# Altium PCB esp_rot.PcbDoc
Units mil, origin at the board's own origin, x right, y up, seen from the top; angles counter-clockwise.
Board outline 2559.06 x 3149.61 mil, 2 copper layers (Top Layer, Bottom Layer), stack 65.792 mil thick; 17 components, 14 nets, 86 pads, 4 vias.
Unrouted connection lines stored in the file: 14.
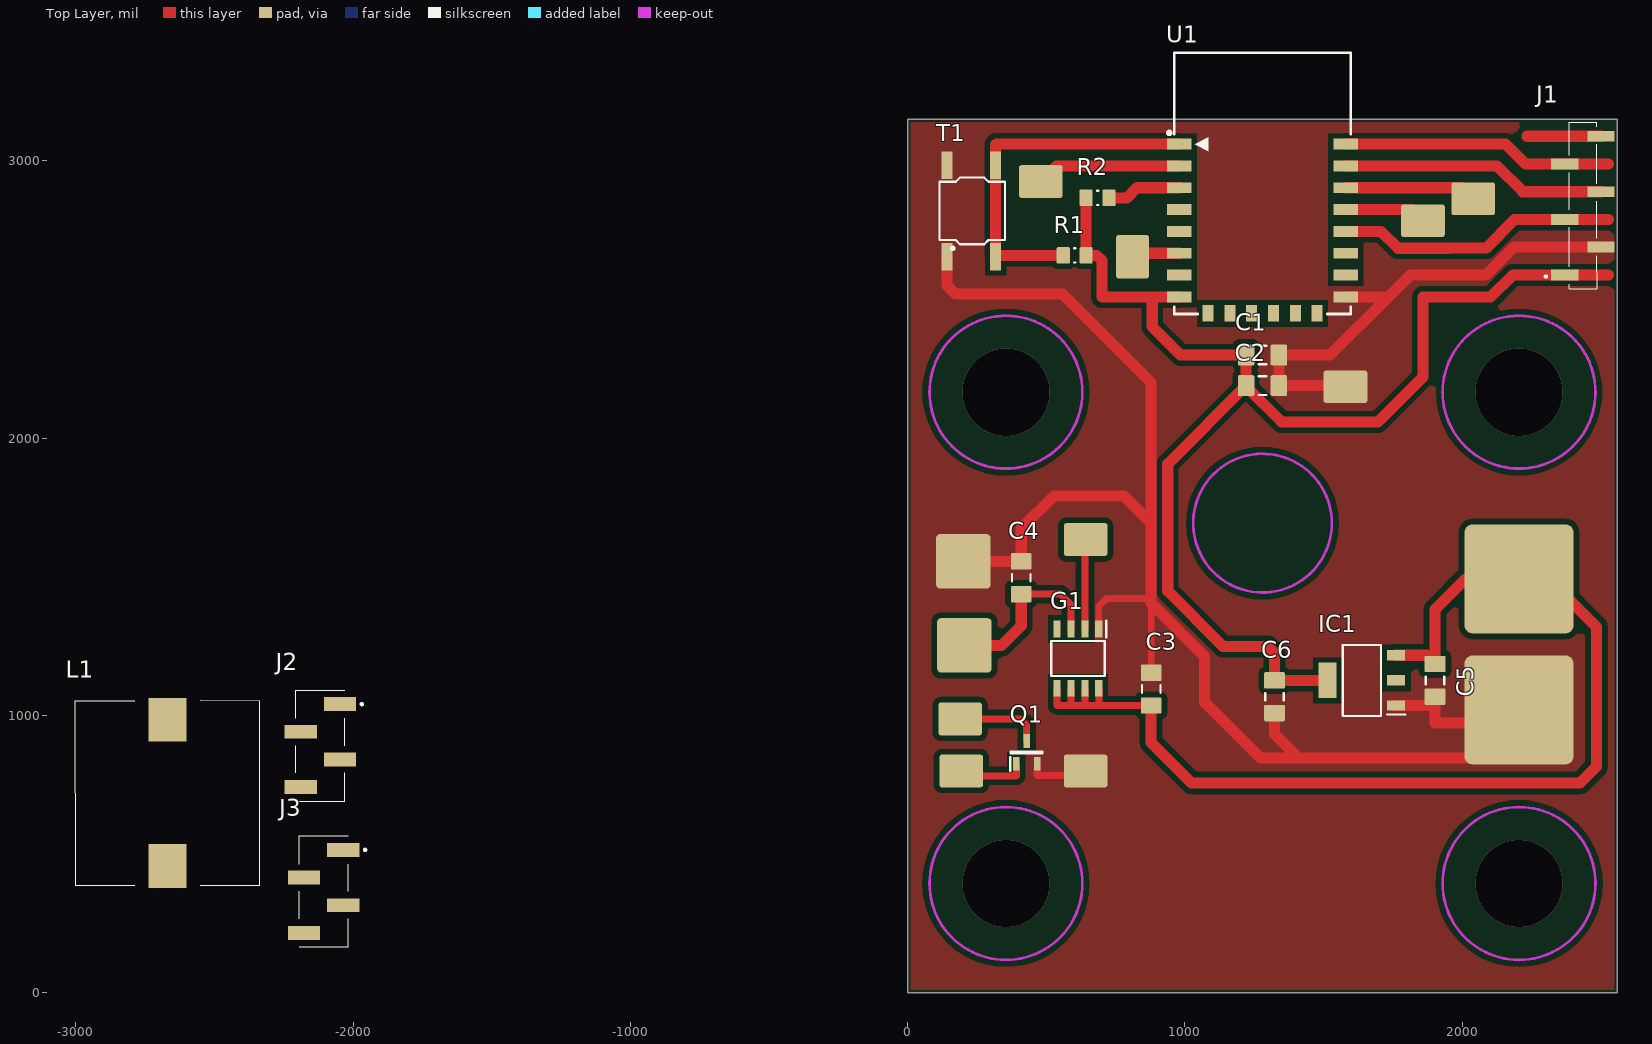
[diagram p0: Top Layer view]
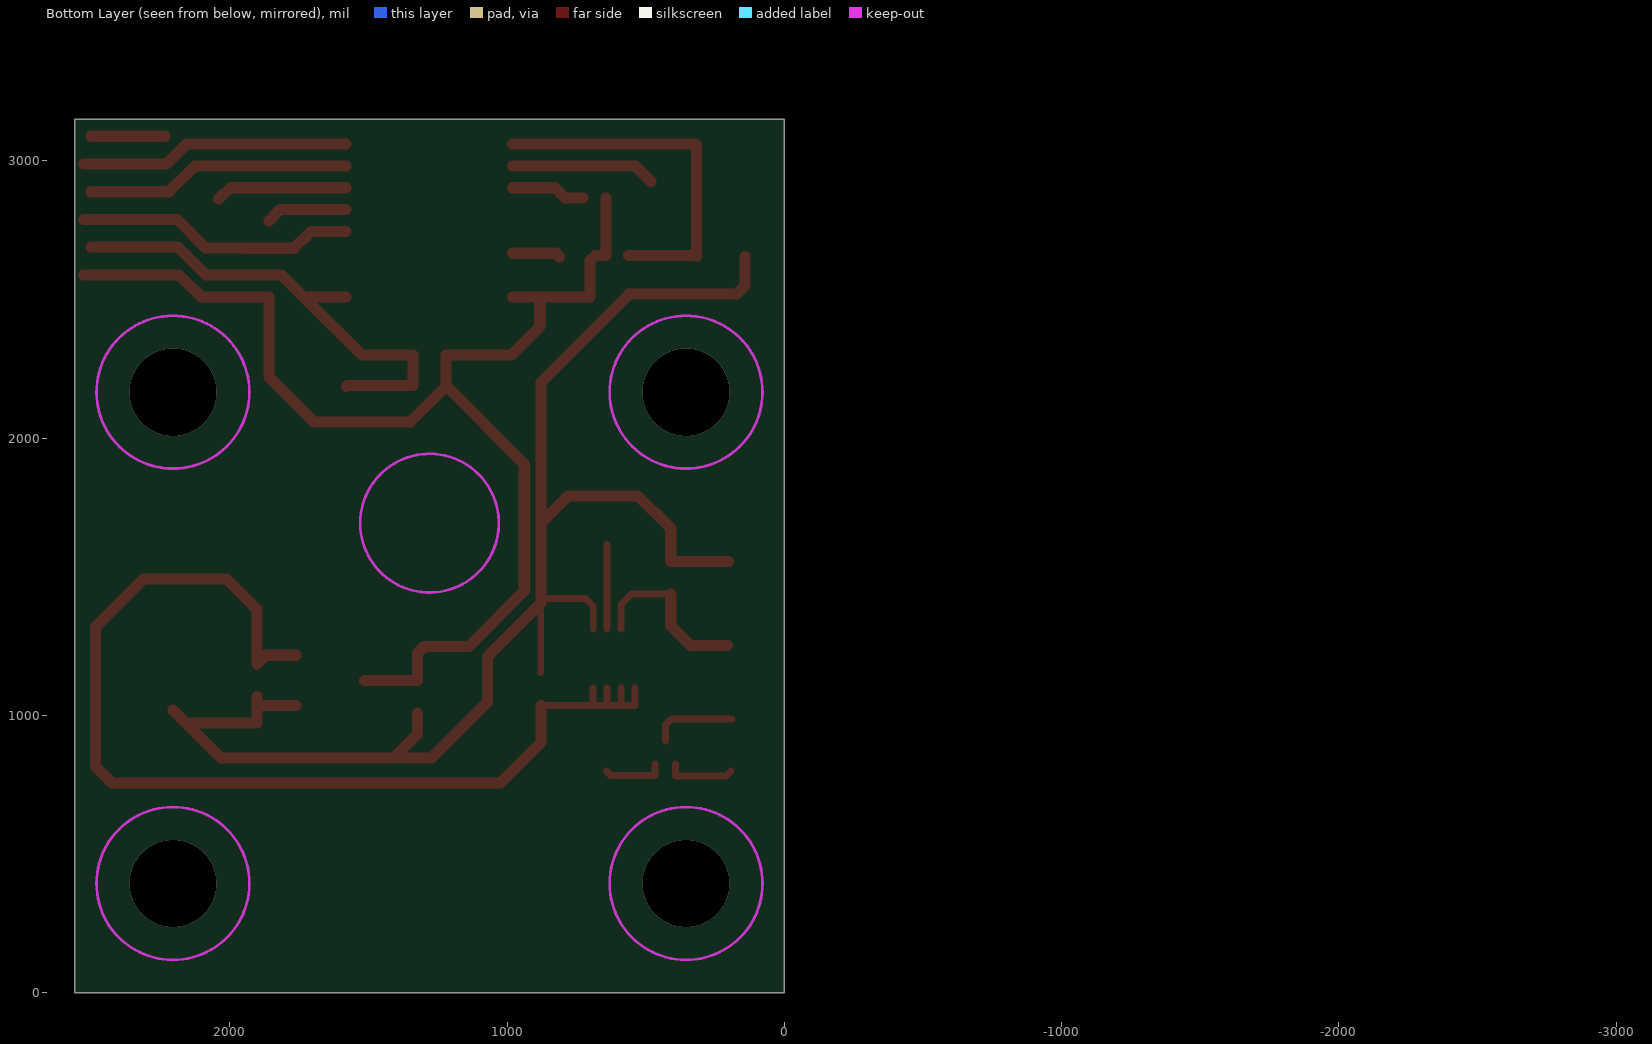
[diagram p1: Bottom Layer view, seen from below]

## Layer stack, top to bottom
Top Layer: signal copper 1.4
Dielectric 1: core 62.9921, FR-4, Dk 4.2
Bottom Layer: signal copper 1.4

## Board outline
0,0 2559.06,0 2559.05,3149.61 0,3149.61

## Design rules (kind name [scope] priority, off if disabled: settings)
BoardOutlineClearance [All] p1: gap=10 ignorepadtopadclearanceinfootprint=FALSE except(0: Arc-SplitContinuation Track-SplitContinuation SMDPad-SplitContinuation THPad-SplitContinuation Via-SplitContinuation Fill-SplitContinuation Poly-SplitContinuation Region-SplitContinuation Text-SplitContinuation)
Clearance [All] p1: gap=20 ignorepadtopadclearanceinfootprint=TRUE
PolygonConnect PolygonConnect_1 [InNet('GND') vs InNet('GND')] p1: connectstyle=Direct reliefconductorwidth=10 reliefentries=4 polygonreliefangle="90 Angle" airgapwidth=10
PolygonConnect [All] p2: connectstyle=Relief reliefconductorwidth=10 reliefentries=4 polygonreliefangle="90 Angle" airgapwidth=10
RoutingVias [All] p1: holewidth=28 width=50 viastyle="Through Hole" minholewidth=28 minwidth=50 maxholewidth=28 maxwidth=50
SolderMaskExpansion [All] p1: expansion=4
Width [All] p1: maxlimit=120 minlimit=20 preferedwidth=40
30 further rules are at their usual default settings.

## Classes and differential pairs
component class alarm: C1 C2 C3 C4 C5 C6 G1 IC1 J1 J2 J3 L1 Q1 R2 T1 U1

## Components (designator, comment, footprint, x,y, rotation, side; value= is the part's Value field where it differs from the comment)
C1 "C" C3216_1206I_M 1279.53,2299.21 r0 top
C2 "C" C3216_1206I_M 1279.53,2188.98 r0 top
C3 "C" C3216_1206I_M 877.95,1094.49 r90 top
C4 "C" C3216_1206I_M 409.45,1496.06 r90 top
C5 "100n" C3216_1206I_M 1901.57,1125.98 r270 top
C6 "10u" C3216_1206I_M 1322.83,1066.93 r270 top
G1 "ITS4300SSJDXUMA1" SOIC127P600X175-8N 614.17,1204.72 r270 top
IC1 "LD1117S33TR" SOT230P700X180-4N 1637.8,1125.98 r180 top
J1 "M20-8770642R" M208770642R 2423.62,2838.19 r90 top
J2 "87898-0454" 878980454 -2118.11,890.94 r270 top
J3 "87898-0454" 878980454 -2106.3,364.96 r270 top
L1 "CMI-1240-SMT" CMI1240SMT -2669.29,720.47 r180 top
Q1 "2N7002ET" SOT95P237X101-3N 429.13,866.14 r90 top
R1 "R" R2012_0805I_M 602.36,2658.66 r180 top
R2 "R" R2012_0805I_M 685.04,2866.14 r0 top
T1 "MINI 6X6" "SW 5x6 SMD SHORT" 232.28,2818.9 r90 top
U1 "ESP_12_E" ESP_12_E 964.84,3060 r0 top

## Footprints (in the part's own frame and the unit in brackets; to place one, negate y for a bottom-side part, rotate by r counter-clockwise, add the part's x,y. Pads: shape width x height; smd on the part's side, far side on the other; paste and mask are expansions set on the pad)
878980454 [mm]
  rect 1.27x2.96 smd: 1(-3.81,1.8) 2(-1.27,-1.8) 3(1.27,1.8) 4(3.81,-1.8)
  silkscreen extent -5.08,-2.25 5.08,3.9, body extent -5.08,-3.15 5.08,3.15, height 10.91
C3216_1206I_M [mm] "Chip Capacitor, 2-Leads, Body 3.20x1.60mm, IPC Low Density"
  rrect15% 1.5x1.9 smd: 1(-1.5,0) 2(1.5,0)
  silkscreen extent -0.35,-0.85 0.35,0.85, body extent -1.7,-0.9 1.7,0.9, height 1.8
CMI1240SMT [mm]
  rect 3.5x4 smd: 1(0,6.7) 2(0,-6.7)
  silkscreen extent -8.45,-8.5 8.5,8.45, body extent -8.45,-8.45 8.45,8.45, height 8.4
ESP_12_E [mm] "ESP-12 Wi-Fi Module by AI-Thinker"
  rect 2.25x1 smd: 1(0.375,0) 2(0.375,-2) 3(0.375,-4) 4(0.375,-6) 5(0.375,-8) 6(0.375,-10) 7(0.375,-12) 8(0.375,-14) 15(15.625,-14) 16(15.625,-12) 17(15.625,-10) 18(15.625,-8) 19(15.625,-6) 20(15.625,-4) 21(15.625,-2) 22(15.625,0)
  rect 1x1.5 smd: 9(3,-15.5) 10(5,-15.5) 11(7,-15.5) 12(9,-15.5) 13(11,-15.5) 14(13,-15.5)
  silkscreen extent -0.7,-15.57 16.08,8.37, body extent 0,-15.49 16,8.51, height 2.75
M208770642R [mm]
  rect 1x2.51 smd: 1(-6.35,1.36) 2(-3.81,-1.95) 3(-1.27,1.36) 4(1.27,-1.95) 5(3.81,1.36) 6(6.35,-1.95)
  silkscreen extent -7.62,-1.55 7.62,3.2, body extent -7.62,-3.11 7.62,2.51, height 8.1
R2012_0805I_M [mm] "Chip Resistor, 2-Leads, Body 2.05x1.25mm, IPC Low Density"
  rrect15% 1.2x1.5 smd: 1(-1.05,0) 2(1.05,0)
  silkscreen extent -0.05,-0.65 0.05,0.65, body extent -1.1,-0.7 1.1,0.7, height 0.8
SOIC127P600X175-8N [mm]
  rect 1.525x0.65 smd: 1(-2.712,1.905) 2(-2.712,0.635) 3(-2.712,-0.635) 4(-2.712,-1.905) 5(2.712,-1.905) 6(2.712,-0.635) 7(2.712,0.635) 8(2.712,1.905)
  silkscreen extent -3.47,-2.45 1.6,2.58, body extent -3,-2.45 3,2.45, height 1.75
SOT95P237X101-3N [mm]
  rect 1.25x0.6 smd: 1(-1.05,0.95) 2(-1.05,-0.95) 3(1.05,0)
  silkscreen extent -1.67,-1.46 0.08,1.5, body extent -1.18,-1.46 1.18,1.46, height 1.01
SOT230P700X180-4N [mm]
  rect 1.65x0.95 smd: 1(-3.15,2.3) 2(-3.15,0) 3(-3.15,-2.3)
  rect 1.65x3.25 smd: 4(3.15,0)
  silkscreen extent -3.98,-3.25 1.75,3.25, body extent -3.5,-3.25 3.5,3.25, height 1.8
"SW 5x6 SMD SHORT" [mil]
  rect 98.43x39.37 smd: 1(-165,90) 2(-165,-85) 3(165,-85) 4(165,90)
  silkscreen extent -140,-118 120,118, body extent -175,-115 179,121, height 197

## Part data
C1 C2 C3 C4: "Capacitor"
C5 C6: library part C, "Capacitor"
G1: "Generator or Oscillator", Manufacturer_Name=Infineon, Mouser Part Number=726-ITS4300SSJDXUMA1, RS Part Number=1660787, Datasheet Link=https://www.infineon.com/dgdl/Infineon-ITS4300S_SJ_D_01092012S-DS-v01_00-en.pdf?fileId=db3a304339dcf4b1013a01424bef5743, Height=1.75mm, Manufacturer_Part_Number=ITS4300SSJDXUMA1, Mouser Price/Stock=https://www.mouser.com/Search/Refine.aspx?Keyword=726-ITS4300SSJDXUMA1, RS Price/Stock=https://uk.rs-online.com/web/p/products/1660787
IC1: "Integrated Circuit", Manufacturer_Name=STMicroelectronics, Mouser Part Number=511-LD1117S33, RS Part Number=7140697P, Allied_Number=70390201, Allied Price/Stock=http://www.alliedelec.com/stmicroelectronics-ld1117s33tr/70390201/, Datasheet Link=http://www.st.com/st-web-ui/static/active/en/resource/technical/document/datasheet/CD00000544.pdf, Height=1.8mm, Manufacturer_Part_Number=LD1117S33TR, Mouser Price/Stock=https://www.mouser.com/Search/Refine.aspx?Keyword=511-LD1117S33, RS Price/Stock=http://uk.rs-online.com/web/p/products/7140697P
J1: "Connector", Manufacturer_Name=HARWIN, Mouser Part Number=855-M20-8770642R, Datasheet Link=https://cdn.harwin.com/pdfs/M20-877R.pdf, Height=8mm, Manufacturer_Part_Number=M20-8770642R, Mouser Price/Stock=https://www.mouser.com/Search/Refine.aspx?Keyword=855-M20-8770642R
J2 J3: "Connector", Manufacturer_Name=Molex, Mouser Part Number=538-87898-0454, Datasheet Link=https://www.molex.com/pdm_docs/sd/878980454_sd.pdf, Height=10.81mm, Manufacturer_Part_Number=87898-0454, Mouser Price/Stock=https://www.mouser.com/Search/Refine.aspx?Keyword=538-87898-0454
L1: "Inductor", Manufacturer_Name=CUI, Mouser Part Number=490-CMI-1240-SMT, Datasheet Link=https://www.mouser.com/datasheet/2/670/cmi-1240-smt-1310061.pdf, Height=8.3mm, Manufacturer_Part_Number=CMI-1240-SMT, Mouser Price/Stock=https://www.mouser.com/Search/Refine.aspx?Keyword=490-CMI-1240-SMT
Q1: "MOSFET (N-Channel)", Manufacturer_Name="ON Semiconductor", RS Part Number=6900127, Datasheet Link=http://www.onsemi.com/pub/Collateral/2N7002E-D.PDF, Height=1.01mm, Manufacturer_Part_Number=2N7002ET, RS Price/Stock=http://uk.rs-online.com/web/p/products/6900127
U1: "ESP-12 Wi-Fi Module by AI-Thinker", IC=ESP8266-EX, Vendor=Ai-thinker

## Free pads (board coordinates)
  rrect15% 157.48x118.11 smd: 3(2039.37,2862.83) 4(1858.27,2783.46) 6(188.98,987.01) 6(192.91,799.21) 6(480.31,2925.2) 6(641.73,1633.86) 6(641.73,799.21) 6(1578.74,2185.04)
  rrect15% 118.11x157.48 smd: 6(811.02,2653.54)
  rrect15% 393.7x393.7 smd: 7(2204.72,1492.13) 8(2204.72,1019.68)
  rrect15% 196.85x196.85 smd: 9(200.79,1555.12) 9(204.72,1251.97)

## Via types
v1: diameter 314.96, hole 314.96, Top Layer to Bottom Layer, 4 vias

## Nets (pads, with @x,y where several pads share a name; then routed paths per layer and width w, separated by ;. In a path a pad name is that pad's centre, name@x,y a point inside that pad or via, vN(x,y) a via of type N, cw(c..) or ccw(c..) an arc to the next point about the centre after c; other vN are vias at no path point)
ADC: pad.6@480.31,2925.2 U1.2 | length 522.5
  Top Layer w40: pad.6@480.31,2925.2 536.38,2981.26 U1.2
EN: R2.2 U1.3 | length 268.3
  Top Layer w40: R2.2 791.34,2866.14 827.72,2902.52 U1.3
GND: C1.2 C2.2 C3.2 C4.2 C5.2 C6.2 G1.1 IC1.1 J1.2 J2.3 J2.4 J3.3 J3.4 pad.6@641.73,799.21 pad.6@1578.74,2185.04 pad.8 pad.9@200.79,1555.12 Q1.2 T1.1 T1.4 U1.15 | length 7676.8
  Top Layer w24: G1.1 689.17,1393.9 716.54,1421.26 862.2,1421.26 877.95,1405.51 C3.2
  Top Layer w25: Q1.2 466.54,783.46 625.98,783.46 pad.6@641.73,799.21
  Top Layer w40: T1.1 142.28,2550.63 173.23,2519.69 559.06,2519.69 ; pad.9@200.79,1555.12 C4.2 409.45,1673.23 527.56,1791.34 779.53,1791.34 877.95,1692.91 ; 561.02,2517.72 559.06,2519.69 ; C6.2 1322.83,933.07 1409.45,846.46 ; pad.6@1578.74,2185.04 1574.8,2188.98 C2.2 C1.2 1523.62,2299.21 1733.23,2508.82 ; U1.15 1733.23,2508.82 ; IC1.1 1893.7,1035.43 C5.2@1901.57,1043.31 ; C5.2 C5.2@1901.57,1043.31 ; pad.8 pad.8@2157.48,972.44 ; J1.2 2186.01,2688.19 2086.01,2588.19 1812.6,2588.19 1733.23,2508.82 ; 559.06,2519.69 877.95,2200.79 877.95,1692.91 ; 877.95,1692.91 877.95,1405.51 1070.87,1212.6 1070.87,1047.24 1271.65,846.46 1409.45,846.46 ; 1409.45,846.46 2031.5,846.46 pad.8@2157.48,972.44 ; C5.2@1901.57,1043.31 1901.57,972.44 pad.8@2157.48,972.44
GPIO0: J1.3 U1.18 | length 1014.9
  Top Layer w40: U1.18 1707.52,2745.04 1768.15,2684.41 1948.39,2684.41 1949.02,2685.04 2086.61,2685.04 2189.01,2787.43 2369.32,2787.43 J1.3 2526.77,2788.19
GPIO12: pad.6@811.02,2653.54 U1.6 | length 173.9
  Top Layer w40: pad.6@811.02,2653.54 823.78,2666.3 U1.6
NetL1_1: L1.1 pad.6@188.98,987.01 Q1.3 | length 306.5
  Top Layer w25: pad.6@188.98,987.01 406.69,987.01 429.13,964.57 Q1.3
Piezo: pad.3 pad.6@192.91,799.21 Q1.1 U1.20 | length 724.5
  Top Layer w25: pad.6@192.91,799.21 210.63,781.5 391.73,781.5 Q1.1
  Top Layer w40: U1.20 1997.01,2902.52 pad.3
RST: J1.6 R1.2 T1.2 T1.3 U1.1 | length 1579.2
  Top Layer w40: R1.2 322.05,2658.66 T1.2 T1.3 317.28,3057.44 319.84,3060 U1.1 ; 2233.86,3088.19 J1.6
RX: J1.4 U1.21 | length 958.9
  Top Layer w40: U1.21 2125.04,2981.26 2218.11,2888.19 J1.4
SW_control: G1.2 pad.4 pad.6@641.73,1633.86 U1.19 | length 599
  Top Layer w25: G1.2 pad.6@639.17,1615.55
  Top Layer w40: U1.19 1817.95,2823.78 pad.4
TX: J1.5 U1.22 | length 977.3
  Top Layer w40: U1.22 2156.54,3060 2228.35,2988.19 J1.5 2527.56,2988.19
VCC: C1.1 C2.1 C6.1 IC1.2 IC1.4 J1.1 L1.2 R1.1 R2.1 U1.8 | length 4648.4
  Top Layer w40: R1.1@643.7,2674.96 R1.1 681.57,2658.66 700.79,2639.45 700.79,2508.82 881.89,2508.82 ; R1.1@643.7,2683.07 R2.1 ; U1.8 881.89,2508.82 ; IC1.4 C6.1 1322.83,1224.41 1299.21,1248.03 1137.8,1248.03 937.95,1447.87 937.95,1906.46 C2.1 ; 2527.56,2588.19 J1.1 2182.68,2588.19 2102.36,2507.87 1858.27,2507.87 1858.27,2220.47 1695.51,2057.71 1348.94,2057.71 1220.47,2186.18 C2.1 ; 881.89,2508.82 881.89,2401.57 984.25,2299.21 C1.1 C2.1
Vsupply: C3.1 C5.1 G1.5 G1.6 G1.7 G1.8 IC1.3 J2.1 J2.2 pad.7 | length 3970.7
  Top Layer w25: G1.5 539.17,1035.43 590.55,1035.43 ; G1.6 589.17,1036.81 590.55,1035.43 ; G1.7 639.17,1037.99 641.73,1035.43 ; G1.8 689.17,1039.17 692.91,1035.43 ; C3.1 692.91,1035.43 ; 590.55,1035.43 641.73,1035.43 ; 641.73,1035.43 692.91,1035.43
  Top Layer w40: C3.1 877.95,901.57 1023.62,755.91 2425.2,755.91 2484.25,814.96 2484.25,1318.9 2311.02,1492.13 pad.7 2011.81,1492.13 1901.57,1381.89 C5.1 1870.08,1216.54 IC1.3
Vsupply_out: C4.1 G1.3 J3.1 J3.2 pad.9@204.72,1251.97 | length 631.2
  Top Layer w25: C4.1 551.18,1437.01 589.17,1399.02 G1.3
  Top Layer w40: pad.9@204.72,1251.97 338.58,1251.97 409.45,1322.83 C4.1
pads on no net: G1.4 U1.4 U1.5 U1.7 U1.9 U1.10 U1.11 U1.12 U1.13 U1.14 U1.16 U1.17
copper on no net:
  other v1: 354.33,393.7 2204.72,393.7 354.33,2165.35 2204.72,2165.35

## Polygon pours and split planes (outlines as drawn)
GND on Top Layer "Gnd_pour" (solid, remove dead copper, pour order 0): -45.28,3194.88 -66.93,-66.93 2653.54,-49.57 2653.54,3208.66

## Keep-outs
Keep-Out Layer:
  circle w10: c354.33,2165.35 r275.59
  circle w10: c354.33,393.7 r275.59
  circle w10: c2204.72,2165.35 r275.59
  circle w10: c2204.72,393.7 r275.59
  circle w10: c1279.53,1692.91 r250

## Text inside footprints (layer, text, board x,y; h text height)
U1: Mechanical 13 "CUTOUT POLYGON" at 969.84,3350 h10; Mechanical 13 "ANTENNA AREA" at 969.84,3370 h10